# Altium PCB LPC1769test.PcbDoc
Units mil, origin at the board's own origin, x right, y up, seen from the top; angles counter-clockwise.
Board outline 6000 x 4000 mil, 2 copper layers (Top Layer, Bottom Layer); 32 components, 37 nets, 202 pads, 29 vias.
Unrouted connection lines stored in the file: 3.
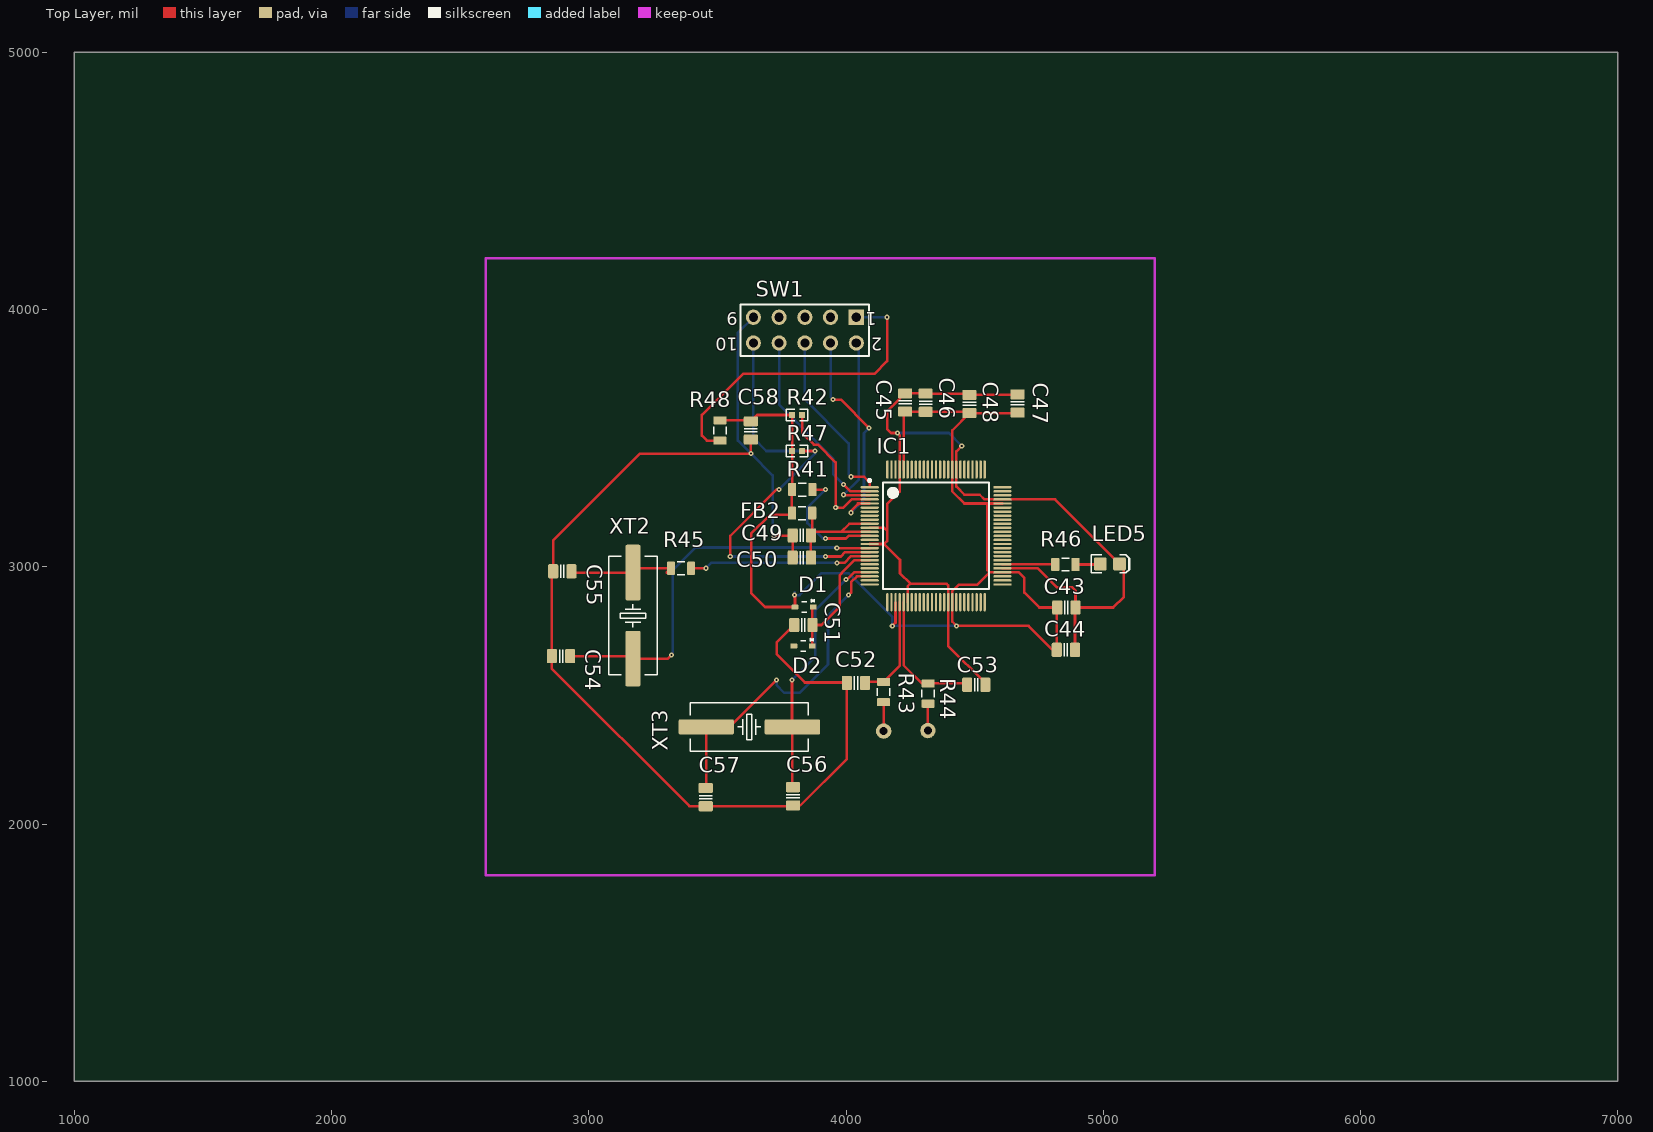
[diagram p0: Top Layer view]
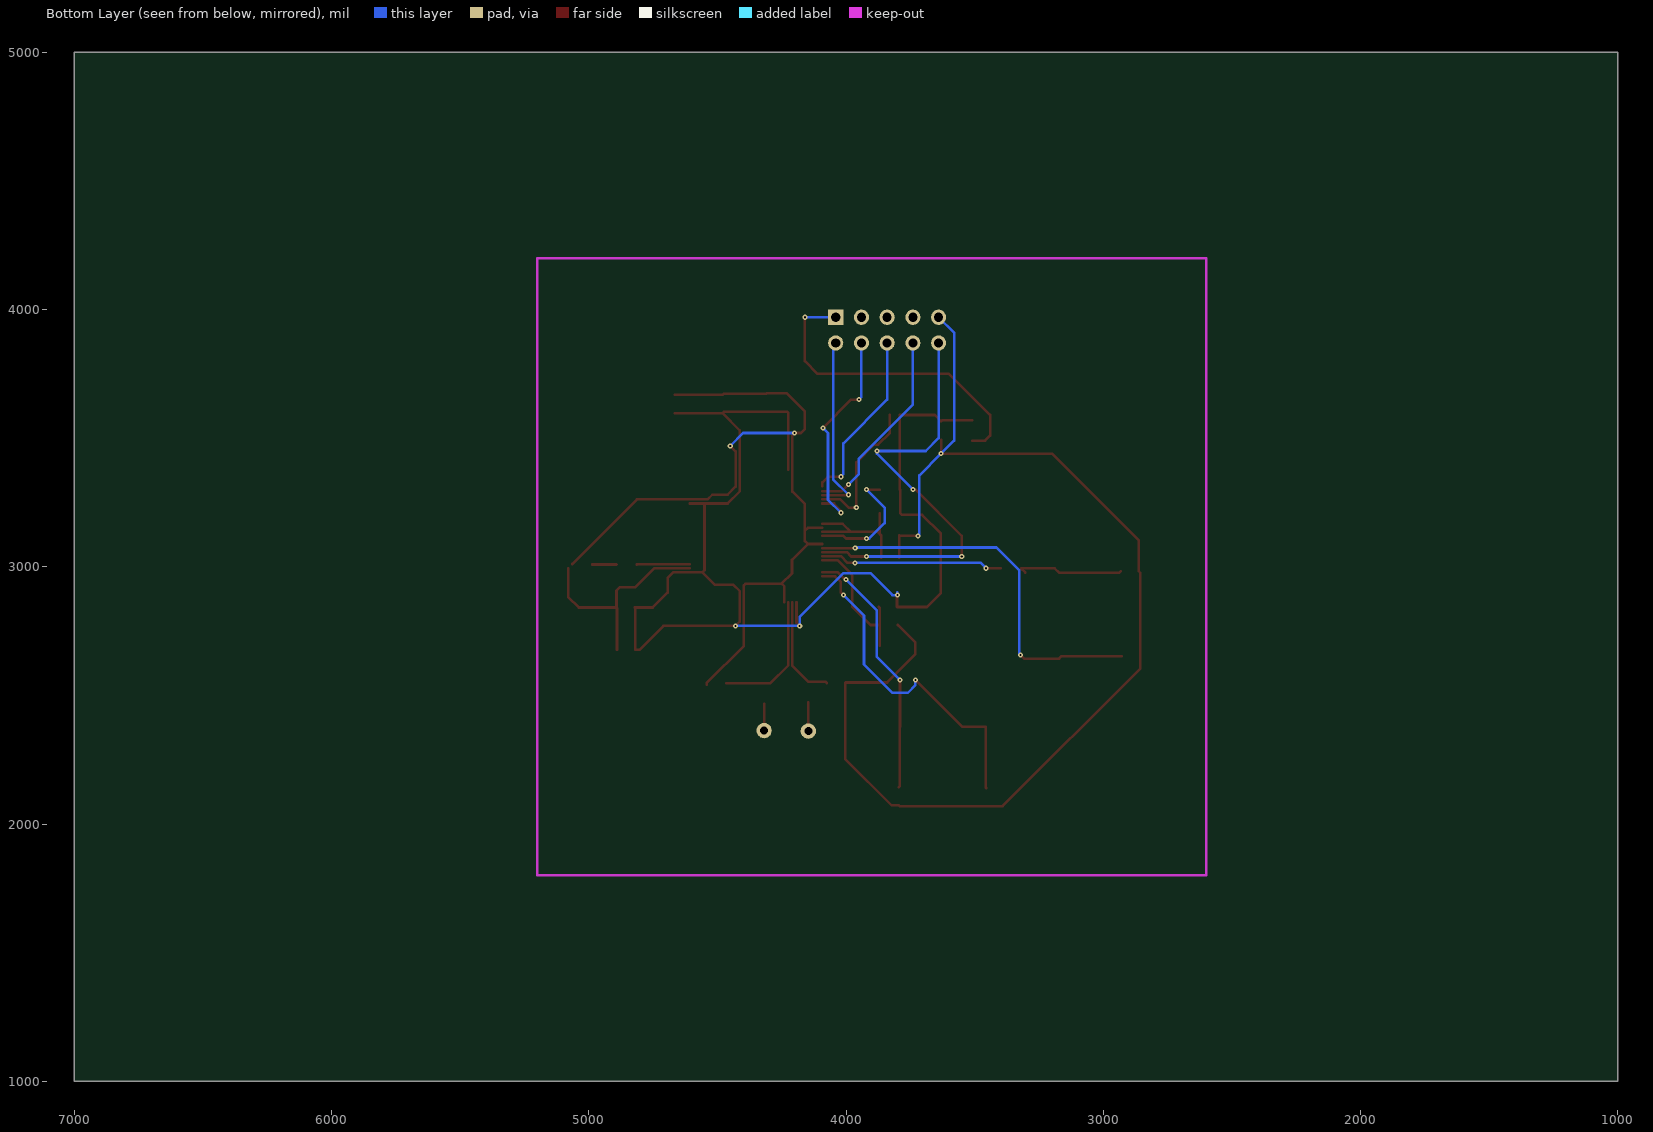
[diagram p1: Bottom Layer view, seen from below]
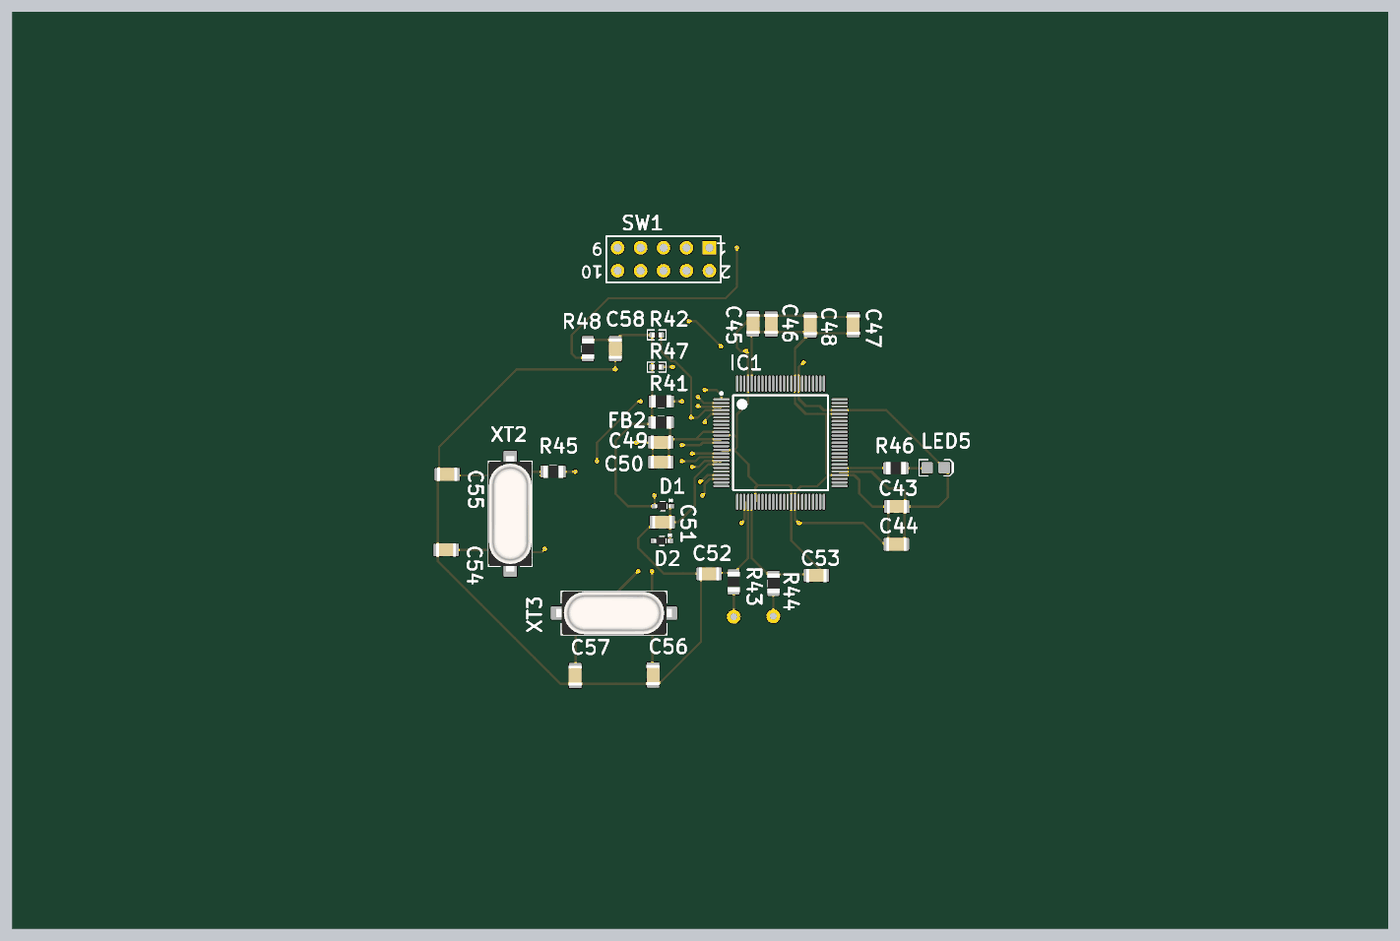
[diagram p2: 3D render of the assembled board from above, using the file's embedded part models]

## Layer stack, top to bottom
Top Layer: signal copper 1.4
Dielectric: dielectric 12.6, FR-4, Dk 4.8
Bottom Layer: signal copper 1.4

## Board outline
1000,1000 7000,1000 7000,5000 1000,5000

## Design rules (kind name [scope] priority, off if disabled: settings)
Clearance [All] p1: gap=10
PolygonConnect [All] p1: connectstyle=Relief reliefconductorwidth=10 reliefentries=4 polygonreliefangle="90 Angle"
RoutingVias [All] p1: holewidth=28 width=50 viastyle="Through Hole" minholewidth=28 minwidth=50 maxholewidth=28 maxwidth=50
SilkscreenOverComponentPads [All] p1: minsilkscreentomaskgap=10
SolderMaskExpansion [All] p1: expansion=4
Width [All] p1: maxlimit=10 minlimit=10 preferedwidth=10
27 further rules are at their usual default settings.

## Components (designator, comment, footprint, x,y, rotation, side; value= is the part's Value field where it differs from the comment)
C43 "approved sub OK" CAPC2012N 4856.81,2841.57 r180 top
C44 "approved sub OK" CAPC2012N 4854.84,2677.2 r180 top
C45 "approved sub OK" CAPC2012N 4229.84,3638.82 r270 top
C46 "approved sub OK" CAPC2012N 4309.57,3637.83 r270 top
C47 "approved sub OK" CAPC2012N 4666.85,3634.88 r270 top
C48 "approved sub OK" CAPC2012N 4479.84,3632.91 r270 top
C49 "approved sub OK" CAPC2012N 3828.27,3122.09 r0 top
C50 "approved sub OK" CAPC2012N 3828.27,3035.47 r0 top
C51 "approved sub OK" CAPC2012N 3834.17,2773.66 r0 top
C52 "approved sub OK" CAPC2012N 4038.9,2548.27 r0 top
C53 "approved sub OK" CAPC2012N 4506.42,2541.38 r180 top
C54 "approved sub OK" CAPC2012N 2892.24,2652.6 r0 top
C55 "approved sub OK" CAPC2012N 2897.17,2982.32 r0 top
C56 "approved sub OK" CAPC2012N 3794.29,2107.56 r90 top
C57 "approved sub OK" CAPC2012N 3454.72,2104.61 r90 top
C58 "approved sub OK" CAPC2012N 3630,3530 r90 top
D1 "4448" SOD523F 3837.13,2843.54 r180 top
D2 "4448" SOD523F 3833.19,2691.97 r180 top
FB2 "Thick Film" RESC2012N 3829.25,3208.7 r180 top
IC1 "LPC176X" TQFP-PT100_N 4350,3120 r0 top
LED5 "Red" LED-0805-A 5026.1,3010.87 r0 top
R41 "Thick Film" RESC2012N 3830,3300 r180 top
R42 "Thick Film" RESC1005N 3810,3590 r0 top
R43 "Thick Film" RESC2012N 4146,2513 r90 top
R44 "Thick Film" RESC2012N 4319,2507 r90 top
R45 "Thick Film" RESC2012N 3358.78,2994.13 r180 top
R46 "Thick Film" RESC2012N 4852.87,3008.9 r0 top
R47 "Thick Film" RESC1005N 3810,3450 r180 top
R48 "Thick Film" RESC2012N 3510,3530 r90 top
SW1 "Header 5X2" HDR2X5 4040,3970 r180 top
XT2 "32.768KHz" CRYSTAL_HC49-US-SM 3171.77,2810.08 r90 top
XT3 "12MHz" CRYSTAL_HC49-US-SM 3624.02,2377.24 r180 top

## Footprints (in the part's own frame and the unit in brackets; to place one, negate y for a bottom-side part, rotate by r counter-clockwise, add the part's x,y. Pads: shape width x height; smd on the part's side, far side on the other; paste and mask are expansions set on the pad)
CAPC2012N [mm] "Chip Capacitor, Body 2.0x1.2mm, 0805, IPC Medium Density"
  round 0.254 on Mech14: 0(0,0)
  rrect25% 1x1.4 smd: 1(-0.9,0) 2(0.9,0)
  Top Layer pour cut-out: -0.4,0.8 0.4,0.8 0.4,-0.8 -0.4,-0.8
  silkscreen extent -0.15,-0.65 0.15,0.65, body extent -1.1,-0.72 1.1,0.73, height 1.34
CRYSTAL_HC49-US-SM [mm] "SMD Crystal HC49/US-SM package"
  round 0.508 on Mech14: 0(0,0)
  rrect25% 5.5x1.5 smd: 1(-4.25,0) 2(4.25,0)
  silkscreen extent -5.84,-2.41 5.84,2.41, body extent -6.4,-2.41 6.4,2.42, height 4.29
HDR2X5 [mm] "Connector; Header; 5x2 Position"
  rect 1.5x1.5 hole 0.9: 1(0,0)
  round 1.5 hole 0.9: 2(0,2.54) 3(2.54,0) 4(2.54,2.54) 5(5.08,0) 6(5.08,2.54) 7(7.62,0) 8(7.62,2.54) 9(10.16,0) 10(10.16,2.54)
  silkscreen extent -1.27,-1.27 11.43,3.81
LED-0805-A [mil]
  round 20 on Mech14: 0(0,0)
  rrect25% 50x50 smd: A(-37.5,0) K(37.5,0)
  Top Layer pour cut-out: -15,30 15,30 15,-30 -15,-30
  silkscreen extent -72,-35 77,35, body extent -39,-25 39,25, height 31
RESC1005N [mm] "Chip Resistor, Body 1.0x0.5mm, EIA 0402, IPC Medium Density"
  round 0.2 on Mech14: 0(0,0)
  rrect20% 0.6x0.6 smd: 1(-0.5,0) 2(0.5,0)
  Top Layer pour cut-out: -0.2,0.35 0.2,0.35 0.2,-0.35 -0.2,-0.35
  silkscreen extent -1.05,-0.55 1.05,0.55, body extent -0.52,-0.27 0.53,0.28, height 0.4
RESC2012N [mm] "Chip Resistor, Body 2.0x1.2mm, 0805, IPC Medium Density"
  round 0.254 on Mech14: 0(0,0)
  rrect25% 0.8x1.3 smd: 1(-1,0) 2(1,0)
  Top Layer pour cut-out: -0.6,0.75 0.6,0.75 0.6,-0.75 -0.6,-0.75
  silkscreen extent -0.38,-0.64 0.38,0.64, body extent -1.1,-0.67 1.1,0.68, height 0.69
SOD523F [mm] "SOD-523F; 2 Leads; Body 1.3 x 0.9 mm, (LxW)"
  round 0.508 on Mech14: 0(0,0)
  rrect20% 0.65x0.5 smd: A(0.9,0) K(-0.9,0)
  silkscreen extent -1.02,-0.77 0.25,0.51, body extent -0.85,-0.45 0.85,0.45, height 0.7
TQFP-PT100_N [mm] "Thin QFP, 100-Leads, Body 12x12mm, Pitch 0.4mm, IPC Medium Density"
  oval 1.8x0.24 smd: 1(-6.55,4.8) 2(-6.55,4.4) 3(-6.55,4) 4(-6.55,3.6) 5(-6.55,3.2) 6(-6.55,2.8) 7(-6.55,2.4) 8(-6.55,2) 9(-6.55,1.6) 10(-6.55,1.2) 11(-6.55,0.8) 12(-6.55,0.4) 13(-6.55,0) 14(-6.55,-0.4) 15(-6.55,-0.8) 16(-6.55,-1.2) 17(-6.55,-1.6) 18(-6.55,-2) 19(-6.55,-2.4) 20(-6.55,-2.8) 21(-6.55,-3.2) 22(-6.55,-3.6) 23(-6.55,-4) 24(-6.55,-4.4) 25(-6.55,-4.8) 51(6.55,-4.8) 52(6.55,-4.4) 53(6.55,-4) 54(6.55,-3.6) 55(6.55,-3.2) 56(6.55,-2.8) 57(6.55,-2.4) 58(6.55,-2) 59(6.55,-1.6) 60(6.55,-1.2) 61(6.55,-0.8) 62(6.55,-0.4) 63(6.55,0) 64(6.55,0.4) 65(6.55,0.8) 66(6.55,1.2) 67(6.55,1.6) 68(6.55,2) 69(6.55,2.4) 70(6.55,2.8) 71(6.55,3.2) 72(6.55,3.6) 73(6.55,4) 74(6.55,4.4) 75(6.55,4.8)
  oval 0.24x1.8 smd: 26(-4.8,-6.55) 27(-4.4,-6.55) 28(-4,-6.55) 29(-3.6,-6.55) 30(-3.2,-6.55) 31(-2.8,-6.55) 32(-2.4,-6.55) 33(-2,-6.55) 34(-1.6,-6.55) 35(-1.2,-6.55) 36(-0.8,-6.55) 37(-0.4,-6.55) 38(0,-6.55) 39(0.4,-6.55) 40(0.8,-6.55) 41(1.2,-6.55) 42(1.6,-6.55) 43(2,-6.55) 44(2.4,-6.55) 45(2.8,-6.55) 46(3.2,-6.55) 47(3.6,-6.55) 48(4,-6.55) 49(4.4,-6.55) 50(4.8,-6.55) 76(4.8,6.55) 77(4.4,6.55) 78(4,6.55) 79(3.6,6.55) 80(3.2,6.55) 81(2.8,6.55) 82(2.4,6.55) 83(2,6.55) 84(1.6,6.55) 85(1.2,6.55) 86(0.8,6.55) 87(0.4,6.55) 88(0,6.55) 89(-0.4,6.55) 90(-0.8,6.55) 91(-1.2,6.55) 92(-1.6,6.55) 93(-2,6.55) 94(-2.4,6.55) 95(-2.8,6.55) 96(-3.2,6.55) 97(-3.6,6.55) 98(-4,6.55) 99(-4.4,6.55) 100(-4.8,6.55)
  silkscreen extent -6.67,-5.25 5.25,5.59, body extent -6,-6 6,6, height 1.2

## Part data
C43 C44 C45 C46 C47 C48 C49 C50 C51 C52 C53 C54 C55 C56 C57 C58: library part CAPC_100n_0805, "Capacitor SMD Cer 100nF 10% 50V X7R 0805"
D1 D2: library part DIODE_1N4148_200mA_SOD523F, "Diode SMD small signal 0.2A SOD-523F"
FB2 R41 R43 R44 R45 R46 R48: library part RES_10K_0805_5%, "Resistor SMD chip 10k Ohm 0.125W 5% 0805"
LED5: library part LED_SMD_Red_0805, "LED, 0805 SMD, Red"
R42 R47: library part RES_330R_0402_5%, "Resistor SMD chip 330 Ohm 0.063W 5% 0402"
SW1: "Header, 5-Pin, Dual row"
XT2 XT3: library part Crystal_6MHz_HC49/US, "Resonator Ceramic 6.00 MHz 30ppm"

## Free pads (board coordinates)
  round 60 hole 30: 1(4318.43,2363.23) 2(4146.18,2361.26)

## Via types
v1: diameter 20, hole 8, Top Layer to Bottom Layer, 29 vias

## Nets (pads, with @x,y where several pads share a name; then routed paths per layer and width w, separated by ;. In a path a pad name is that pad's centre, name@x,y a point inside that pad or via, vN(x,y) a via of type N, cw(c..) or ccw(c..) an arc to the next point about the centre after c; other vN are vias at no path point)
ENET-CRS: IC1.92
ENET-MDC: IC1.87
ENET-MDIO: IC1.86
ENET-REF_CLK: IC1.88
ENET-RX_ER: IC1.89
ENET-RXD0: IC1.91
ENET-RXD1: IC1.90
ENET-TX_EN: IC1.93
ENET-TXD0: IC1.95
ENET-TXD1: IC1.94
GND: C43.1 C44.1 C45.1 C46.1 C47.1 C48.1 C49.1 C50.1 C51.1 C52.1 C53.1 C54.1 C55.1 C56.1 C57.1 C58.1 IC1.11 IC1.15 IC1.31 IC1.41 IC1.55 IC1.72 IC1.83 IC1.97 LED5.K SW1.3 SW1.5 SW1.9 | length 8901.1
  Top Layer w10: C55.1@2856.81,2977.4 C54.1 2856.81,2603.19 3390.83,2069.17 C57.1 3791.34,2069.17 C56.1 3822.13,2072.13 4003.46,2253.46 C52.1 ; C55.1 2861.73,3101.73 3200,3440 v1(3630,3440) C58.1 ; v1(3720,3120) C49.1@3790.75,3120 ; C50.1 C49.1 ; C51.1 3730,2704.92 3730,2660 3840,2550 C52.1@4001.73,2550 ; IC1.15 4148.5,3088.5 ; IC1.11 4148.5,3151.5 4160,3140 ; IC1.31 4239.76,2924.25 4250,2934.49 ; C46.1@4308.58,3674.25 C45.1 4160,3604.41 4160,3535.75 4175.75,3520 v1(4200,3520) 4208.27,3511.73 IC1.97 4208.27,3291.73 4160,3243.46 4160,3140 ; C46.1 C48.1@4474.92,3673.27 ; v1(4450,3470) 4428.74,3448.74 IC1.83 4428.74,3311.26 4460,3280 4520,3280 4538.27,3261.73 IC1.72 4812.74,3261.73 LED5.K ; C48.1 C47.1@4664.88,3668.35 ; C53.1 4541.85,2548.15 4397.24,2692.76 IC1.41 4397.24,2927.24 4390,2934.49 4250,2934.49 ; IC1.55 4745.98,2994.02 4820,2920 4880,2920 4892.24,2907.76 C43.1 5038.43,2841.57 5080,2883.15 LED5.K@5080,2994.47 ; C44.1 C43.1@4890.28,2839.61 ; 4148.5,3088.5 4160,3100 4160,3140 ; 4148.5,3088.5 4210,3027.01 4210,2974.49 4250,2934.49
  Bottom Layer w10: SW1.9 3580,3910 3580,3490 v1(3630,3440) 3715,3355 v1@3715,3125 ; v1(4200,3520) 4400,3520 v1(4450,3470)
JTAG_RESETX: IC1.17 R47.1 SW1.10 | length 1762.7
  Top Layer w10: v1(3550,3040) 3550,3120 v1@3730,3300 ; R47.1 v1(3880,3450) ; v1(3920,3040) 3980,3040 3997.01,3057.01 IC1.17
  Bottom Layer w10: v1(3550,3040) v1(3920,3040) ; SW1.10 3640,3500 3690,3450 v1(3880,3450) ; v1(3740,3300) 3880,3440
JTAG_RTCK: SW1.7
JTAG_TCLK_SWCLKX: IC1.5 SW1.4 | length 842.8
  Top Layer w10: v1(3950,3650) 3980,3650 v1(4090,3540) ; v1(4020,3210) 4020,3216.71 4045.02,3241.73 ; 4045.98,3245.98 IC1.5
  Bottom Layer w10: 3940,3660 SW1.4 ; v1(4020,3210) 4070,3260 4070,3520 v1(4090,3540)
JTAG_TDIX: IC1.2 SW1.8 | length 771
  Top Layer w10: v1@3994.25,3320 v1(3990,3320) 4016.77,3293.23 IC1.2
  Bottom Layer w10: SW1.8 3740,3630.36 3950,3420.36 3950,3360 v1(3990,3320)
JTAG_TDO_SWOX: IC1.1 SW1.6 | length 676.6
  Top Layer w10: v1(4020,3350) 4070,3350 4092.13,3327.87 IC1.1@4092.13,3312.95
  Bottom Layer w10: SW1.6 3840,3650 4010,3480 4010,3360
JTAG_TMS_SWDIOX: IC1.3 SW1.2 | length 722.2
  Top Layer w10: v1(3990,3280) 3992.52,3277.48 IC1.3
  Bottom Layer w10: v1(3990,3280) 4050,3340 4050,3860 SW1.2
NetC49_2: C49.2 C50.2 FB2.1 IC1.10 IC1.12 | length 526.3
  Top Layer w10: C50.2 C49.2 C49.2@3868.62,3127.01 ; FB2.1 C49.2@3868.62,3127.01 ; IC1.12 3981.26,3135.75 ; IC1.10 4012.76,3167.24 3981.26,3135.75 ; C49.2@3868.62,3127.01 3877.36,3135.75 3981.26,3135.75
NetC51_2: C51.2 D1.K D2.K IC1.19 | length 551.4
  Top Layer w10: D2.K@3869.61,2692.95 C51.2 ; D1.K 3869.61,2840.59 C51.2 ; IC1.19 4032.87,3025.51 3982.8,2975.43 3982.8,2974.45 3975,2966.65 3975,2939.64 3975.79,2938.86 3975.79,2845.39 3904.06,2773.66 C51.2
NetC52_2: C52.2 IC1.29 R43.2 | length 408.9
  Top Layer w10: C52.2 4078.43,2552.37 R43.2 4208.27,2614.64 IC1.29
NetC53_2: C53.2 IC1.30 R44.2 | length 512.1
  Top Layer w10: IC1.30 4224.02,2617.09 R44.2@4294.73,2546.37 ; R44.2@4298.98,2546.37 R44.2 C53.2@4465.99,2546.37
NetC54_2: C54.2 IC1.16 XT2.1 | length 1535.7
  Top Layer w10: C54.2 3161.93,2652.6 XT2.1 3307.6,2642.76 v1(3321.38,2656.54) ; v1(3964.21,3072.76) IC1.16
  Bottom Layer w10: v1(3321.38,2656.54) 3327.28,2662.44 3327.28,2987.24 3414.88,3074.84 v1@3962.13,3074.84
NetC55_2: C55.2 R45.2 XT2.2 | length 419.4
  Top Layer w10: C55.2 2937.52,2977.4 XT2.2 3188.5,2994.13 R45.2 3302.68,2977.4
NetC56_2: C56.2 IC1.22 XT3.1 | length 999.6
  Top Layer w10: v1(3790,2560) 3790,2378.58 XT3.1 3791.34,2145.95 C56.2 ; v1(4000,2950) 4003.46,2950 4031.73,2978.27 IC1.22
  Bottom Layer w10: v1(3790,2560) 3880,2650 3880,2830 v1(4000,2950)
NetC57_2: C57.2 IC1.23 XT3.2 | length 1303.8
  Top Layer w10: C57.2 3456.69,2142.01 XT3.2 3547.24,2377.24 v1(3730,2560) ; v1(4010,2890) 4020,2900 4020,2940 4042.52,2962.52 IC1.23
  Bottom Layer w10: v1(3730,2560) 3730,2540 3760,2510 3820,2510 3930,2620 3930,2810 v1(4010,2890)
NetIC1_4: IC1.4 R42.2 | length 568.2
  Top Layer w10: R42.2 3829.68,3520.32 3875,3475 3890.36,3475 3960,3405.36 v1(3960,3230) 3990,3230 4021.73,3261.73 IC1.4
NetIC1_13: IC1.13 R41.1 | length 480.7
  Top Layer w10: R41.1 v1(3920,3300) ; v1(3920,3110) 4000,3110 4010,3120 IC1.13
  Bottom Layer w10: v1(3920,3110) 3910,3110 3850,3170 3850,3230 v1(3920,3300)
NetIC1_18: IC1.18 R45.1 | length 713.7
  Top Layer w10: R45.1 v1(3455.24,2994.13) v1@3458.19,2997.09 ; v1(3965.08,3014.8) 3993.62,3014.8 4020.08,3041.26 ; 4020.2,3041.38 4020.08,3041.26 ; IC1.18 4020.08,3041.26
  Bottom Layer w10: v1@3458.19,2997.09 3475.91,3014.8 v1(3965.08,3014.8)
NetLED5_A: LED5.A R46.2 | length 94.4
  Top Layer w10: R46.2 LED5.A@4986.63,3008.9
NetR48_1: R48.1 SW1.1 | length 1255
  Top Layer w10: R48.1 3459.37,3490.63 3440,3510 3440,3590 3600,3750 4110,3750 4160,3800 v1(4160,3970)
  Bottom Layer w10: SW1.1 v1(4160,3970)
RSTOUT_N: IC1.14
RTS1_TD1: IC1.56 R46.1 | length 206
  Top Layer w10: IC1.56 4812.64,3009.76 R46.1
USB-CONNECT_RXD2: IC1.64
USB-D+: pad.2 R43.1 | length 112.2
  Top Layer w10: pad.2 R43.1@4146.18,2473.45
USB-D-: pad.1 R44.1 | length 103.8
  Top Layer w10: pad.1 R44.1@4318.43,2467.06
VB: D2.A
VIO_3V3X: C43.2 C44.2 C45.2 C46.2 C47.2 C48.2 C58.2 D1.A FB2.2 IC1.28 IC1.42 IC1.54 IC1.71 IC1.84 IC1.96 R41.2 R42.1 R47.2 R48.2 | length 4946.4
  Top Layer w10: R48.2 3626.06,3569.37 C58.2 3654.57,3590 R42.1 R47.2 ; R41.2@3789.88,3299.25 FB2.2 3782.99,3201.81 3704.25,3201.81 3631.42,3128.98 3631.42,2897.68 3685.55,2843.54 D1.A v1@3801.69,2888.31 ; R41.2 R47.2@3790.63,3449.69 ; v1(4180,2770) 4192.52,2782.52 IC1.28 ; IC1.96 4224.02,3597.56 C45.2 C46.2@4308.58,3603.39 ; C46.2 C48.2@4474.92,3602.4 ; IC1.71 4550,3245.98 ; C47.2@4664.88,3597.48 C48.2 4412.99,3530.63 IC1.84 4412.99,3292.99 4460,3245.98 4550,3245.98 ; C43.2@4819.41,2839.61 C44.2 4802.8,2677.2 4710,2770 v1(4430,2770) 4412.99,2787.01 IC1.42 4412.99,2904.98 4438.01,2930 4510,2930 4558.27,2978.27 ; C43.2 4751.57,2841.57 4693.15,2900 4693.15,2956.85 4671.73,2978.27 IC1.54 4558.27,2978.27 ; 4550,3245.98 4550,2986.54 4558.27,2978.27
  Bottom Layer w10: 3800,2900 v1(3800,2890) 3820,2890 3905,2975 4010.36,2975 4180,2805.36 v1(4180,2770) v1(4430,2770)
pads on no net: C43.0 C44.0 C45.0 C46.0 C47.0 C48.0 C49.0 C50.0 C51.0 C52.0 C53.0 C54.0 C55.0 C56.0 C57.0 C58.0 D1.0 D2.0 FB2.0 IC1.6 IC1.7 IC1.8 IC1.9 IC1.20 IC1.21 IC1.24 IC1.25 IC1.26 IC1.27 IC1.32 IC1.33 IC1.34 IC1.35 IC1.36 IC1.37 IC1.38 IC1.39 IC1.40 IC1.43 IC1.44 IC1.45 IC1.46 IC1.47 IC1.48 IC1.49 IC1.50 IC1.51 IC1.52 IC1.53 IC1.57 IC1.58 IC1.59 IC1.60 IC1.61 IC1.62 IC1.63 IC1.65 IC1.66 IC1.67 IC1.68 IC1.69 IC1.70 IC1.73 IC1.74 IC1.75 IC1.76 IC1.77 IC1.78 IC1.79 IC1.80 IC1.81 IC1.82 IC1.85 IC1.98 IC1.99 IC1.100 LED5.0 R41.0 R42.0 R43.0 R44.0 R45.0 R46.0 R47.0 R48.0 XT2.0 XT3.0

## Keep-outs
Keep-Out Layer:
  lines w10: 2600,1800 4900,1800 5200,1800 5200,4200 2600,4200 2600,1800

## Text inside footprints (layer, text, board x,y; h text height)
SW1: Top Overlay "2" at 4140,3890 h50 r180; Top Overlay "1" at 4120,3990 h50 r180; Top Overlay "9" at 3580,3990 h50 r180; Top Overlay "10" at 3580,3890 h50 r180